# EAGLE board transistor_board (EAGLE 9.6.2)
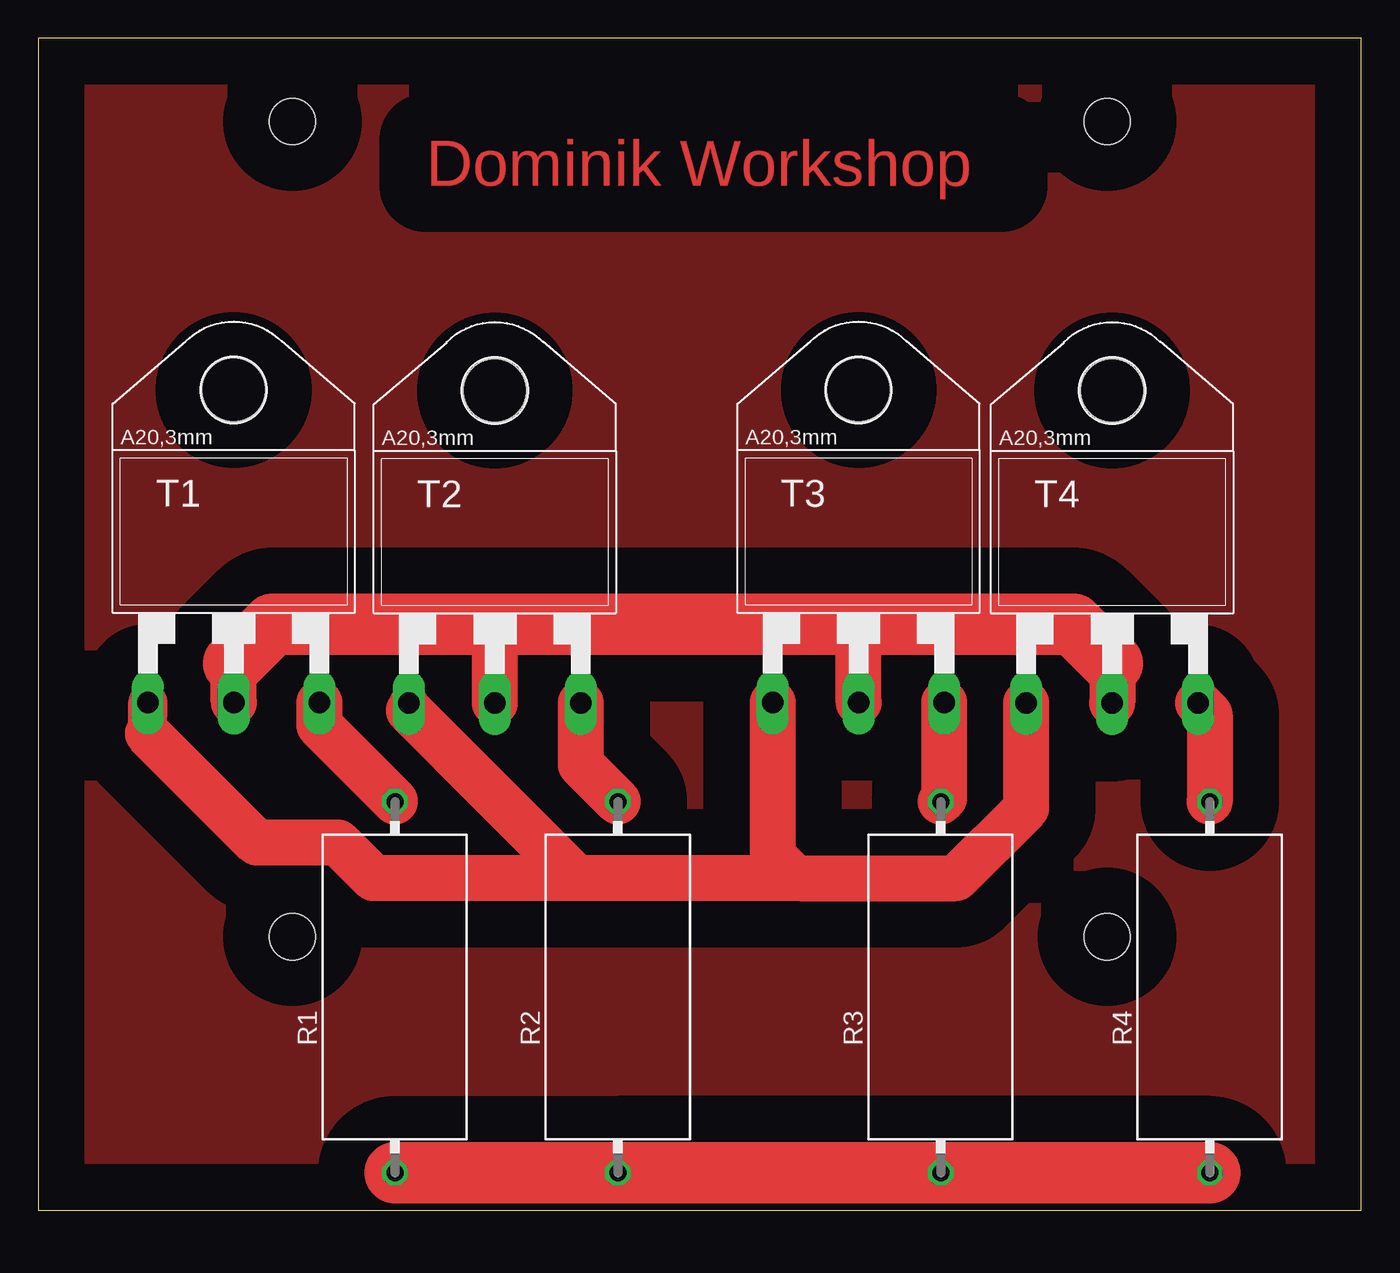
[diagram p0: board, top side]

Size 86.03 x 76.19 mm. Coordinates in mm from the lower left corner, seen from the top.
Outline: 0,0 86.03,0 86.03,76.19 0,76.19 0,0
Copper layers (1*16): Top 0.035mm / dielectric 1.5mm / Bottom 0.035mm
Design rules "default": minimum track width 6mil, minimum drill 0.35mm, track to track 6mil, track to pad 6mil, pad to pad 6mil, via to via 6mil, smd to smd 6mil, copper to edge 40mil, drill to drill 6mil, minimum pad ring 10mil, minimum via ring 8mil, stop-mask expansion 4mil, vias tented up to drill 0mil, thermal gap 10mil
Holes 3 mm at 16.51,17.78 69.51,17.78 69.51,70.78 16.51,70.78

## Footprints (pad centres in the part's own frame; a part is rotated, then mirrored left to right if it is on the bottom)
VTA53 = drill 1.1 octagon: 1 -12.065,0; 2 12.065,0
TOP3 = drill 1.397 long: 1 -5.588,-7.62; 2 0,-7.62; 3 5.588,-7.62 | hole 4.115: 0,12.7

## Placement (x,y rotation side)
R1  [VTA53]  23.19,14.5 90 top
R2  [VTA53]  37.69,14.5 90 top
R3  [VTA53]  58.69,14.5 90 top
R4  [VTA53]  76.19,14.5 90 top
T1  BD249  [TOP3]  12.7,40.64 0 top
T2  BD249  [TOP3]  29.69,40.6 0 top
T3  BD249  [TOP3]  53.34,40.64 0 top
T4  BD249  [TOP3]  69.84,40.6 0 top

## Library data of the parts
R1-R4 = rcl; SPICEPREFIX: R
T1-T4 = transistor-neu-to92

## Nets
N$1: R1.2 T1.3
N$2: R2.2 T2.3
N$3: R3.2 T3.3
N$4: R1.1 R2.1 R3.1 R4.1
N$5: T1.2 T2.2 T3.2 T4.2
N$7: T1.1 T2.1 T3.1 T4.1
N$8: R4.2 T4.3

## Tracks (layer width: path | path; a pad name or v marks a point on that pad's centre or on a via)
GND
  pour Top (isolate 3): 0,-2.54 86.36,-2.54 86.36,76.2 0,76.2
N$1
  Top 3: R1.2 23.19,26.6 18.29,31.5 T1.3
N$2  (1 unrouted)
  Top 3: R2.2 35.28,28.98 T2.3
N$3
  Top 3: R3.2 58.93,26.8 T3.3
N$4
  Top 4: R1.1 R2.1 R3.1 R4.1
N$5
  Top 2.54: 29.69,37.62 29.21,38.1
  Top 3: T1.2 12.7,35.56 | 69.84,35.57 T4.2 | T3.2 53.34,38.1 | T2.2 29.69,37.62
  Top 4: 12.7,35.56 15.24,38.1 29.21,38.1 53.34,38.1 67.31,38.1 69.84,35.57
N$6  (via drill 0.35)
  other vias: 16.51,17.78
N$7
  Top 2.54: 7.11,32.26 T1.1 7.11,30.99 | T2.1 24.1,32.49 | 47.75,23.37 49.53,21.59
  Top 3: T4.1 64.25,26.15 59.69,21.59 49.53,21.59 35,21.59 | 24.1,32.49 35,21.59 | T3.1 47.75,23.37 | 7.11,30.99 14.2,23.9 19.49,23.9 21.8,21.59 35,21.59
N$8
  Top 3: T4.3 76.19,32.22 R4.2
N$9  (via drill 0.35)
  other vias: 16.49,70.8
N$10  (via drill 0.35)
  other vias: 69.49,70.8
N$11  (via drill 0.35)
  other vias: 69.49,17.8

## Text on the board
Top: Dominik Workshop